# EAGLE board BUZZI-44 (EAGLE 4.15)
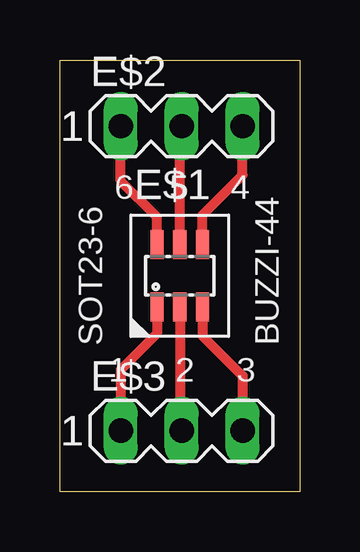
[diagram p0: board, top side]

Size 10 x 18 mm. Coordinates in mm from the lower left corner, seen from the top.
Outline: 0,0 0,18 10,18 10,0 0,0
Copper layers (1*16): Top 0.035mm / dielectric 1.5mm / Bottom 0.035mm
Design rules "PCB-POOL": minimum track width 6mil, minimum drill 12mil, track to track 6mil, track to pad 6mil, pad to pad 6mil, via to via 6mil, smd to smd 6mil, copper to edge 20mil, drill to drill 8mil, minimum pad ring 8mil, minimum via ring 6mil, stop-mask expansion 3mil, vias tented up to drill 0mil, thermal gap 8mil

## Footprints (pad centres in the part's own frame; a part is rotated, then mirrored left to right if it is on the bottom)
SOT23-6L = smd 0.55 x 1.2: 1 -0.95,-1.3; 2 0,-1.3; 3 0.95,-1.3; 4 0.95,1.3; 5 0,1.3; 6 -0.95,1.3
MA03-1 = drill 1.016 long: 1 -2.54,0; 2 0,0; 3 2.54,0

## Placement (x,y rotation side)
E$1  [SOT23-6L]  5,9 0 top
E$2  [MA03-1]  5.08,15.24 0 top
E$3  [MA03-1]  5.08,2.54 0 top

## Library data of the parts
E$1 = turbod3
E$2 E$3 = con-lstb

## Nets
S$1: E$1.6 E$2.1
S$2: E$1.5 E$2.2
S$3: E$1.4 E$2.3
S$4: E$1.1 E$3.1
S$5: E$1.2 E$3.2
S$6: E$1.3 E$3.3

## Tracks (layer width: path | path; a pad name or v marks a point on that pad's centre or on a via)
S$1
  Top 0.406: E$1.6 4.05,11.44 2.54,12.95 2.54,14.99 2.79,15.24 E$2.1
S$2
  Top 0.406: E$1.5 5,15.16 E$2.2
S$3
  Top 0.406: E$1.4 5.95,11.54 7.62,13.21 E$2.3
S$4
  Top 0.406: E$1.1 4.05,6.59 2.54,5.08 E$3.1 2.54,2.29
S$5
  Top 0.406: E$1.2 5,2.62 E$3.2
S$6
  Top 0.406: E$1.3 5.95,6.5 7.62,4.83 E$3.3 7.62,2.29

## Text on the board
tNames: 6 | 5 | 4 | SOT23-6 | BUZZI-44 | 1 | 2 | 3